# EAGLE board AD5791_V2 (EAGLE 6.6.0)
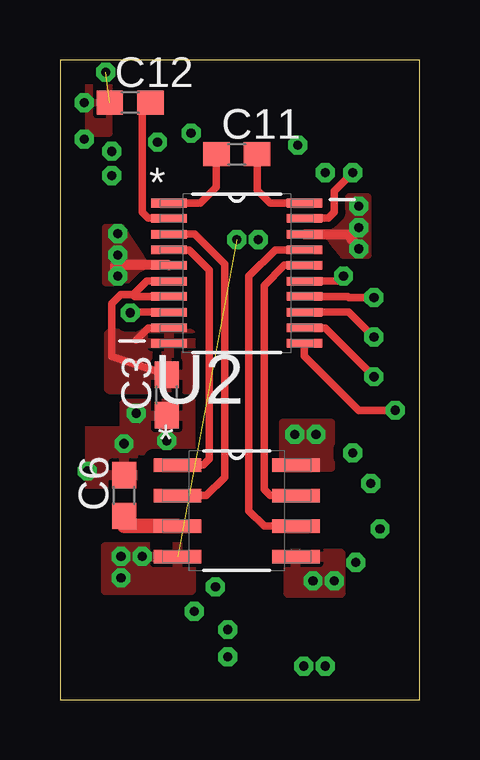
[diagram p0: board, top side]
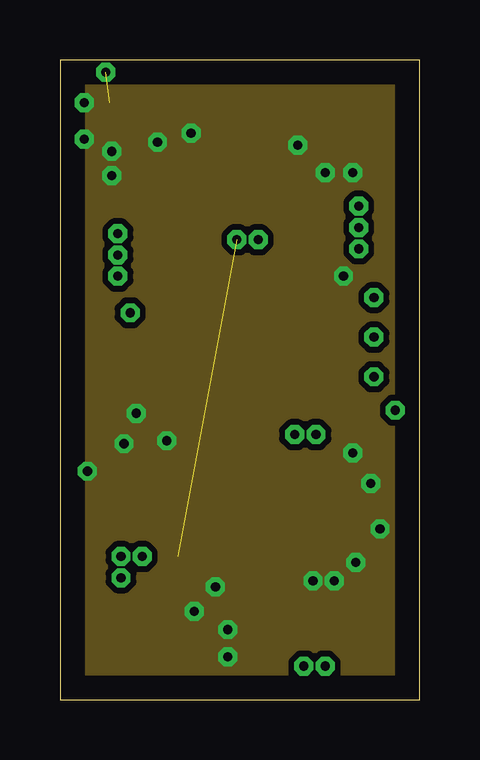
[diagram p1: board, inner layer Route2]
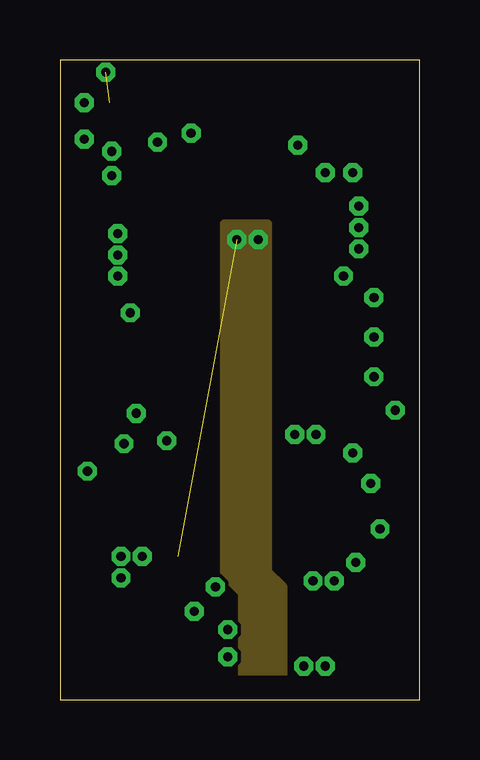
[diagram p2: board, inner layer Route14]
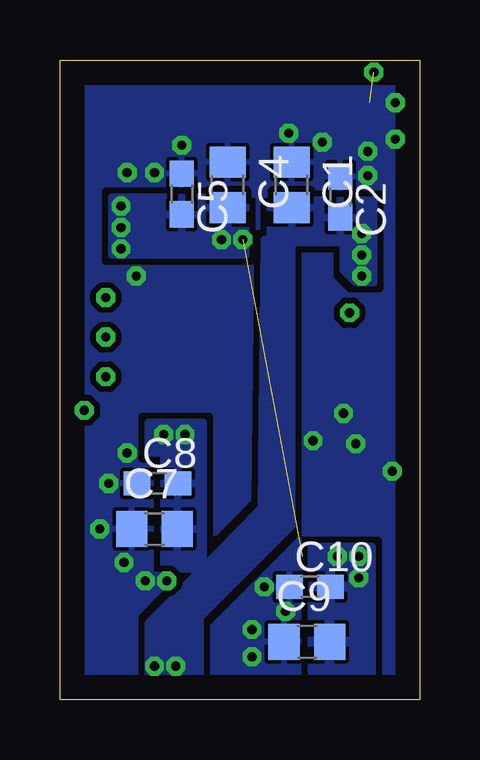
[diagram p3: board, bottom side, seen from below]

Size 14.99 x 26.67 mm. Coordinates in mm from the lower left corner, seen from the top.
Outline: 0,0 14.99,0 14.99,26.67 0,26.67 0,0
Copper layers (1*2*3*14*15*16): Top 0.035mm / dielectric 1.5mm / Route2 0.035mm / dielectric 0.15mm / Route3 0.035mm / dielectric 0.2mm / Route14 0.035mm / dielectric 0.15mm / Route15 0.035mm / dielectric 0.2mm / Bottom 0.035mm
Design rules "default *": minimum track width 6mil, minimum drill 15mil, track to track 6mil, track to pad 6mil, pad to pad 6mil, via to via 6mil, smd to smd 6mil, copper to edge 40mil, drill to drill 8mil, minimum pad ring 10mil, minimum via ring 8mil, stop-mask expansion 4mil, vias tented up to drill 0mil, thermal gap 6mil

## Footprints (pad centres in the part's own frame; a part is rotated, then mirrored left to right if it is on the bottom)
C0805 = smd 1.3 x 1.5: 1 -0.95,0; 2 0.95,0
C0603 = smd 1.1 x 1: 1 -0.85,0; 2 0.85,0
SOP65P640X120-20N = smd 1.473 x 0.356: 1 -2.819,2.921; 2 -2.819,2.286; 3 -2.819,1.626; 4 -2.819,0.965; 5 -2.819,0.33; 6 -2.819,-0.33; 7 -2.819,-0.965; 8 -2.819,-1.626; 9 -2.819,-2.286; 10 -2.819,-2.921; 11 2.819,-2.921; 12 2.819,-2.286; 13 2.819,-1.626; 14 2.819,-0.965; 15 2.819,-0.33; 16 2.819,0.33; 17 2.819,0.965; 18 2.819,1.626; 19 2.819,2.286; 20 2.819,2.921
SOIC127P600X175-8N = smd 1.981 x 0.559: 1 -2.464,1.905; 2 -2.464,0.635; 3 -2.464,-0.635; 4 -2.464,-1.905; 5 2.464,-1.905; 6 2.464,-0.635; 7 2.464,0.635; 8 2.464,1.905

## Placement (x,y rotation side)
C1  10uF  [C0805]  5.33,21.46 270 bottom
C2  0.1uF  [C0603]  3.3,20.95 270 bottom
C3  [C0603]  4.45,12.7 90 top
C4  10uF  [C0805]  8,21.46 270 bottom
C5  0.1uF  [C0603]  9.91,21.08 270 bottom
C6  0.1uF  [C0603]  2.67,8.51 90 top
C7  10uF  [C0805]  11.05,7.11 0 bottom
C8  0.1uF  [C0603]  10.92,9.02 0 bottom
C9  10uF  [C0805]  4.7,2.41 0 bottom
C10  0.1uF  [C0603]  4.57,4.7 0 bottom
C11  10pF  [C0603]  7.37,22.73 0 top
C12  50pF  [C0603]  2.92,24.89 0 top
U1  AD5791BRUZ  [SOP65P640X120-20N]  7.37,17.78 0 top
U2  AD8676ARZ  [SOIC127P600X175-8N]  7.37,7.87 0 top

## Library data of the parts
C1-C12 = eagle-ltspice; SPICEMODEL: NONE; SPICEPREFIX: C
U1 = Analog Devices_By_element14_Batch_1; MPN: AD5791BRUZ; OC_FARNELL: -; OC_NEWARK: 85R6432; PACKAGE: TSSOP-20; SUPPLIER: Analog Devices
U2 = Analog Devices_By_element14_Batch_1; MPN: AD8676ARZ; OC_FARNELL: 1316453; OC_NEWARK: 28M4146; PACKAGE: SOIC-8; SUPPLIER: Analog Devices

## Nets
+VPWR: C1.2 C2.2 C7.2 C8.2 U1.5 U2.8
-VPWR: C4.2 C5.2 C9.2 C10.2 U1.18 U2.4
ANALOG_REF: C6.1 U2.3
DPWR: C3.2 U1.6 U1.7 U1.9 U1.10
GND: C1.1 C2.1 C3.1 C4.1 C5.1 C6.2 C7.1 C8.1 C9.1 C10.1 C12.1 U1.15 U1.19 U2.5
LDAC: U1.8
N$1: U1.4 U2.1
N$2: U1.16 U2.7
N$3: U1.3 U2.2
N$4: U1.17 U2.6
N$5: C12.2 U1.2
N$6: C11.1 U1.1
N$7: C11.2 U1.20
SCLK_1: U1.13
SDIN_1: U1.12
SDO_1: U1.11
SYNC_1: U1.14

## Tracks (layer width: path | path; a pad name or v marks a point on that pad's centre or on a via)
+VPWR  (via drill 0.38)
  Top 0.406: U1.5 2.29,18.11 2.29,17.78
  other vias: 10.67,11.05 9.78,11.05 2.41,19.43 2.41,18.54 2.41,17.65 10.16,1.4 11.05,1.4
  pour Top (isolate 0.305): 3.56,18.16 2.54,19.68 1.91,19.68 1.91,17.4 2.79,17.4
  pour Top (isolate 0.406, no thermals): 9.27,9.65 11.3,9.65 11.3,11.56 9.27,11.56
  pour Bottom (isolate 0.305): 1.91,17.4 2.67,17.4 3.17,17.91 3.17,19.05 6.22,19.05 6.22,20.83 1.91,20.83
  pour Bottom (isolate 0.254): 11.3,10.29 11.3,11.56 9.02,11.56 9.02,5.46 10.67,5.46 10.67,10.29
  pour Bottom (isolate 0.254): 5.33,19.18 5.33,7.24 9.14,3.43 9.14,0.89 11.3,0.89 11.3,3.17 6.6,8 6.48,19.18
-VPWR  (via drill 0.38)  (1 unrouted)
  Top 0.406: U1.18 11.96,19.41 v12.45,18.8
  other vias: 12.45,19.68 2.54,5.97 2.54,5.08 3.43,5.97 12.45,20.57 7.37,19.18 8.26,19.18
  pour Top (isolate 0.305): 11.05,19.43 11.81,18.54 12.83,18.54 12.83,20.95 11.81,20.95
  pour Bottom (isolate 0.254): 2.03,6.35 2.03,1.14 4.45,1.14 4.45,6.35
  pour Top (isolate 0.254): 1.91,6.35 1.91,4.57 5.46,4.57 5.46,6.35
  pour Bottom (isolate 0.305): 7.24,20.95 7.24,18.54 12.83,18.54 12.83,20.95
  pour Route14: 6.86,19.81 6.86,5.21 7.62,4.45 7.62,1.02 9.27,1.02 9.27,4.7 8.64,5.33 8.64,19.81
ANALOG_REF
  Top 0.61: U2.3 2.67,7.24 C6.1
DPWR
  Top 0.305: U1.6 3.61,17.45 3.05,16.89 | 3.05,16.89 2.54,16.89 2.16,16.51 2.16,14.31 C3.2 | U1.7 3.12,16.82 3.05,16.89 | U1.9 3.68,15.49 3.17,14.99
  pour Top (isolate 0.406): 5.46,15.24 2.03,15.24 2.03,12.95 5.46,12.95
GND  (via drill 0.38)  (1 unrouted)
  Top 0.305: U1.15 11.61,17.45 v11.81,17.65 | U1.19 11.18,20.07 11.43,20.32 11.43,21.21 v12.19,21.97
  other vias: 5.46,23.62 11.05,21.97 2.16,22.86 4.06,23.24 2.16,21.84 1.14,9.53 12.19,10.29 12.95,9.02 12.32,5.71 13.34,7.11 6.99,1.78 5.59,3.68 6.48,4.7 6.99,2.92 9.91,23.11 1.02,23.37 10.54,4.95 11.43,4.95 2.67,10.67 4.45,10.79 3.17,11.94 1.02,24.89 1.91,26.16
  pour Route2 (isolate 0.254, rank 6): -1.52,27.94 16.26,27.94 16.26,-1.27 -1.52,-1.27
  pour Top (isolate 0.406): 9.53,6.1 11.68,6.1 11.68,4.45 9.53,4.45
  pour Top (isolate 0.406): 0.89,11.18 0.89,9.02 3.05,9.02 3.05,11.18
  pour Top (isolate 0.406): 2.67,12.32 2.67,10.41 5.59,10.41 5.59,12.32
  pour Top (isolate 0.406): 0.64,25.78 0.64,23.62 2.03,23.62 2.03,25.78
  pour Bottom (isolate 0.254, rank 6): -1.52,27.94 16.26,27.94 16.26,-1.27 -1.52,-1.27
LDAC  (via drill 0.38)
  Top 0.305: U1.8 3.17,16.15
  Top 0.406: 3.17,16.15 v2.92,16.13
N$1
  Top 0.305: U2.1 5.97,9.78 6.22,10.03 6.22,17.91 5.38,18.75 U1.4
N$2
  Top 0.305: U2.7 8.76,8.51 8.51,8.76 8.51,17.27 9.35,18.11 U1.16
N$3
  Top 0.305: U2.2 6.1,8.51 6.86,9.27 6.86,18.16 5.61,19.41 U1.3
N$4
  Top 0.305: U2.6 8.51,7.24 7.87,7.87 7.87,17.65 8.97,18.75 U1.17
N$5
  Top 0.305: U1.2 3.68,20.07 3.43,20.32 3.43,24.77 C12.2
N$6
  Top 0.305: U1.1 5.84,20.7 6.52,21.38 C11.1
N$7
  Top 0.305: U1.20 8.76,20.7 8.22,21.25 C11.2
SCLK_1  (via drill 0.38)
  Top 0.305: U1.13 12.04,16.15 v13.08,15.11
SDIN_1  (via drill 0.38)
  Top 0.305: U1.12 11.05,15.49 v13.08,13.46
SDO_1  (via drill 0.38)
  Top 0.305: U1.11 10.19,14.33 12.45,12.06 v13.97,12.06
SYNC_1  (via drill 0.38)
  Top 0.305: U1.14 11.99,16.82 12.04,16.76 v13.08,16.76